# EAGLE board Servo_2side_x4_v2 (EAGLE 9.6.2)
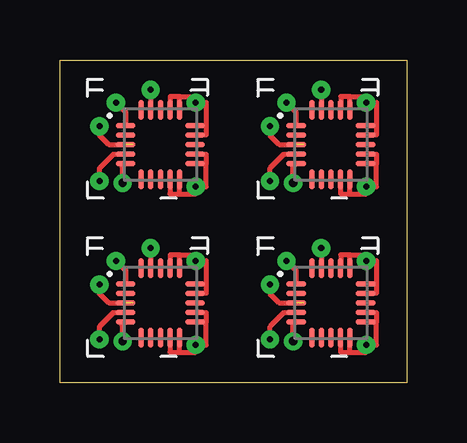
[diagram p0: board, top side]
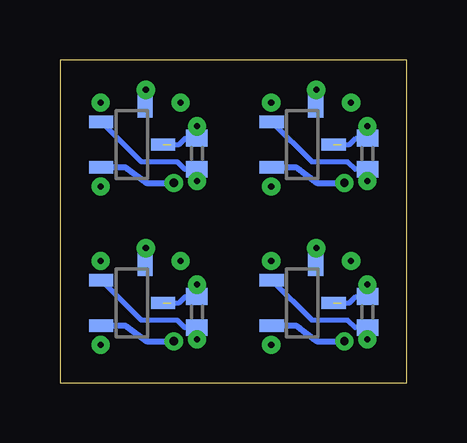
[diagram p1: board, bottom side, seen from below]

Size 14.48 x 13.46 mm. Coordinates in mm from the lower left corner, seen from the top.
Outline: 0,0 0,13.46 14.48,13.46 14.48,0 0,0
Copper layers (1*16): Top 0.035mm / dielectric 1.5mm / Bottom 0.035mm
Design rules "default": minimum track width 6mil, minimum drill 0.35mm, track to track 6mil, track to pad 6mil, pad to pad 6mil, via to via 6mil, smd to smd 6mil, copper to edge 40mil, drill to drill 6mil, minimum pad ring 10mil, minimum via ring 8mil, stop-mask expansion 4mil, vias tented up to drill 0mil, thermal gap 10mil

## Footprints (pad centres in the part's own frame; a part is rotated, then mirrored left to right if it is on the bottom)
C0402 = smd 0.7 x 0.9: 1 -0.65,0; 2 0.65,0
SMALLEST2 = drill 0.254 pad 0.508: P$1 0,0
SMD_SMALL = smd 0.635 x 1.27: P$1 0,0
QFN40P300X300X90-20N = smd 0.811 x 0.22: 1 -1.451,0.8; 2 -1.451,0.4; 3 -1.451,0; 4 -1.451,-0.4; 5 -1.451,-0.8; 11 1.451,-0.8; 12 1.451,-0.4; 13 1.451,0; 14 1.451,0.4; 15 1.451,0.8 | smd 0.22 x 0.811: 6 -0.8,-1.451; 7 -0.4,-1.451; 8 0,-1.451; 9 0.4,-1.451; 10 0.8,-1.451; 16 0.8,1.451; 17 0.4,1.451; 18 0,1.451; 19 -0.4,1.451; 20 -0.8,1.451
SOT23W = smd 0.508 x 1.016: 1 -0.95,-1.278; 2 0.95,-1.278; 3 0,1.303

## Placement (x,y rotation side)
C1  [C0402]  1.65,2.95 90 bottom
C2  [C0402]  8.76,2.95 90 bottom
C3  [C0402]  1.65,9.55 90 bottom
C4  [C0402]  8.76,9.55 90 bottom
GND  [SMALLEST2]  1.65,4.09 0 top
GND1  [SMALLEST2]  8.76,4.09 0 top
GND2  [SMALLEST2]  1.65,10.69 0 top
GND3  [SMALLEST2]  8.76,10.69 0 top
M+  [SMALLEST2]  5.66,1.57 0 top
M+1  [SMALLEST2]  12.78,1.57 0 top
M+2  [SMALLEST2]  5.66,8.18 0 top
M+3  [SMALLEST2]  12.78,8.18 0 top
M-  [SMALLEST2]  5.66,5.08 0 top
M-1  [SMALLEST2]  12.78,5.08 0 top
M-2  [SMALLEST2]  5.66,11.68 0 top
M-3  [SMALLEST2]  12.78,11.68 0 top
P1  [SMD_SMALL]  10.92,5.08 180 bottom
P2  [SMD_SMALL]  3.81,5.08 180 bottom
P3  [SMD_SMALL]  3.81,11.68 180 bottom
P4  [SMD_SMALL]  10.92,11.68 180 bottom
PROG  [SMALLEST2]  3.78,5.61 0 top
PROG1  [SMALLEST2]  10.9,5.61 0 top
PROG2  [SMALLEST2]  3.78,12.22 0 top
PROG3  [SMALLEST2]  10.9,12.22 0 top
SIG  [SMALLEST2]  2.34,5.08 0 top
SIG1  [SMALLEST2]  9.45,5.08 0 top
SIG2  [SMALLEST2]  2.34,11.68 0 top
SIG3  [SMALLEST2]  9.45,11.68 0 top
U1  ATTINY1616-NOPAD  [QFN40P300X300X90-20N]  4.19,3.33 0 top
U2  A1304ELHLX-TSOT23W-NOSILK  [SOT23W]  4.37,3.33 270 bottom
U3  ATTINY1616-NOPAD  [QFN40P300X300X90-20N]  11.3,3.33 0 top
U4  A1304ELHLX-TSOT23W-NOSILK  [SOT23W]  11.48,3.33 270 bottom
U5  ATTINY1616-NOPAD  [QFN40P300X300X90-20N]  4.19,9.93 0 top
U6  A1304ELHLX-TSOT23W-NOSILK  [SOT23W]  4.37,9.93 270 bottom
U7  ATTINY1616-NOPAD  [QFN40P300X300X90-20N]  11.3,9.93 0 top
U8  A1304ELHLX-TSOT23W-NOSILK  [SOT23W]  11.48,9.93 270 bottom
V+  [SMALLEST2]  1.65,1.8 0 top
V+1  [SMALLEST2]  8.76,1.8 0 top
V+2  [SMALLEST2]  1.65,8.41 0 top
V+3  [SMALLEST2]  8.76,8.41 0 top

## Library data of the parts
C1-C4 = rcl; SPICEPREFIX: C
GND GND1-GND3 M+ M+1-M+3 M- M-1-M-3 P1-P4 PROG PROG1-PROG3 SIG SIG1-SIG3 U1-U8 V+ V+1-V+3 = MyParts

## Nets
GND: C1.2 GND.P$1 U1.3 U2.3
GND1: C2.2 GND1.P$1 U3.3 U4.3
GND2: C3.2 GND2.P$1 U5.3 U6.3
GND3: C4.2 GND3.P$1 U7.3 U8.3
M+: M+.P$1 U1.9 U1.10 U1.11 U1.12
M+1: M+1.P$1 U3.9 U3.10 U3.11 U3.12
M+2: M+2.P$1 U5.9 U5.10 U5.11 U5.12
M+3: M+3.P$1 U7.9 U7.10 U7.11 U7.12
M-: M-.P$1 U1.14 U1.15 U1.16 U1.17
M-1: M-1.P$1 U3.14 U3.15 U3.16 U3.17
M-2: M-2.P$1 U5.14 U5.15 U5.16 U5.17
M-3: M-3.P$1 U7.14 U7.15 U7.16 U7.17
N$1: P1.P$1 PROG1.P$1 U3.19
N$2: U3.5 U4.2
N$3: P3.P$1 PROG2.P$1 U5.19
N$4: U5.5 U6.2
N$5: P2.P$1 PROG.P$1 U1.19
N$6: P4.P$1 PROG3.P$1 U7.19
N$7: U7.5 U8.2
N$8: U1.5 U2.2
SIG: SIG.P$1 U1.1
SIG1: SIG1.P$1 U3.1
SIG2: SIG2.P$1 U5.1
SIG3: SIG3.P$1 U7.1
V+: C1.1 U1.4 U2.1 V+.P$1
V+1: C2.1 U3.4 U4.1 V+1.P$1
V+2: C3.1 U5.4 U6.1 V+2.P$1
V+3: C4.1 U7.4 U8.1 V+3.P$1

## Tracks (layer width: path | path; a pad name or v marks a point on that pad's centre or on a via)
GND  (1 unrouted)
  Top 0.203: GND.P$1 1.65,3.71 2.03,3.33 U1.3
  Bottom 0.203: C1.2 GND.P$1 | U2.3 2.4,3.33 2.13,3.6
GND1  (1 unrouted)
  Top 0.203: GND1.P$1 8.76,3.71 9.14,3.33 U3.3
  Bottom 0.203: C2.2 GND1.P$1 | U4.3 9.52,3.33 9.25,3.6
GND2  (1 unrouted)
  Top 0.203: GND2.P$1 1.65,10.31 2.03,9.93 U5.3
  Bottom 0.203: C3.2 GND2.P$1 | U6.3 2.4,9.93 2.13,10.2
GND3  (1 unrouted)
  Top 0.203: GND3.P$1 8.76,10.31 9.14,9.93 U7.3
  Bottom 0.203: C4.2 GND3.P$1 | U8.3 9.52,9.93 9.25,10.2
M+
  Top 0.203: U1.9 4.59,1.27 4.99,1.27 | 4.99,1.27 U1.10 | U1.12 6.1,2.93 6.1,2.53 | 6.1,2.53 U1.11 | 4.99,1.27 5.66,1.27 M+.P$1 6.1,1.57 6.1,2.53
M+1
  Top 0.203: U3.9 11.7,1.27 12.1,1.27 | 12.1,1.27 U3.10 | U3.12 13.21,2.93 13.21,2.53 | 13.21,2.53 U3.11 | 12.1,1.27 12.78,1.27 M+1.P$1 13.21,1.57 13.21,2.53
M+2
  Top 0.203: U5.9 4.59,7.87 4.99,7.87 | 4.99,7.87 U5.10 | U5.12 6.1,9.53 6.1,9.13 | 6.1,9.13 U5.11 | 4.99,7.87 5.66,7.87 M+2.P$1 6.1,8.18 6.1,9.13
M+3
  Top 0.203: U7.9 11.7,7.87 12.1,7.87 | 12.1,7.87 U7.10 | U7.12 13.21,9.53 13.21,9.13 | 13.21,9.13 U7.11 | 12.1,7.87 12.78,7.87 M+3.P$1 13.21,8.18 13.21,9.13
M-
  Top 0.203: U1.16 4.99,5.33 | 4.99,5.33 4.6,5.33 U1.17 | U1.15 6.1,4.13 | U1.14 6.1,3.73 6.1,4.13 | 4.99,5.33 5.66,5.33 M-.P$1 6.1,5.08 6.1,4.13
M-1
  Top 0.203: U3.16 12.1,5.33 | 12.1,5.33 11.71,5.33 U3.17 | U3.15 13.21,4.13 | U3.14 13.21,3.73 13.21,4.13 | 12.1,5.33 12.78,5.33 M-1.P$1 13.21,5.08 13.21,4.13
M-2
  Top 0.203: U5.16 4.99,11.94 | 4.99,11.94 4.6,11.94 U5.17 | U5.15 6.1,10.73 | U5.14 6.1,10.33 6.1,10.73 | 4.99,11.94 5.66,11.94 M-2.P$1 6.1,11.68 6.1,10.73
M-3
  Top 0.203: U7.16 12.1,11.94 | 12.1,11.94 11.71,11.94 U7.17 | U7.15 13.21,10.73 | U7.14 13.21,10.33 13.21,10.73 | 12.1,11.94 12.78,11.94 M-3.P$1 13.21,11.68 13.21,10.73
N$1
  Top 0.152: U3.19 | PROG1.P$1
  Top 0.203: PROG1.P$1 U3.19
  Bottom 0.152: PROG1.P$1 10.92,5.59 P1.P$1
N$2  (via drill 0.35)
  Top 0.203: U3.5 9.73,2.4
  Top 0.254: 9.73,2.4 v9.73,1.73
  Bottom 0.254: v9.73,1.73 10.87,1.73 11.76,2.39 12.75,2.38 U4.2
N$3
  Top 0.152: U5.19 | PROG2.P$1 3.79,12.21
  Top 0.203: 3.79,12.21 U5.19
  Bottom 0.152: PROG2.P$1 3.81,12.19 P3.P$1
N$4  (via drill 0.35)
  Top 0.203: U5.5 2.61,9
  Top 0.254: 2.61,9 v2.61,8.33
  Bottom 0.254: v2.61,8.33 3.76,8.33 4.64,8.99 5.63,8.98 U6.2
N$5
  Top 0.152: U1.19 | PROG.P$1 3.79,5.61
  Top 0.203: 3.79,5.61 U1.19
  Bottom 0.152: PROG.P$1 3.81,5.59 P2.P$1
N$6
  Top 0.152: U7.19 | PROG3.P$1
  Top 0.203: PROG3.P$1 U7.19
  Bottom 0.152: PROG3.P$1 10.92,12.19 P4.P$1
N$7  (via drill 0.35)
  Top 0.203: U7.5 9.73,9
  Top 0.254: 9.73,9 v9.73,8.33
  Bottom 0.254: v9.73,8.33 10.87,8.33 11.76,8.99 12.75,8.98 U8.2
N$8  (via drill 0.35)
  Top 0.203: U1.5 2.61,2.4
  Top 0.254: 2.61,2.4 v2.61,1.73
  Bottom 0.254: v2.61,1.73 3.76,1.73 4.64,2.39 5.63,2.38 U2.2
SIG
  Top 0.203: SIG.P$1 2.74,4.68 U1.1
SIG1
  Top 0.203: SIG1.P$1 9.85,4.68 U3.1
SIG2
  Top 0.203: SIG2.P$1 2.74,11.28 U5.1
SIG3
  Top 0.203: SIG3.P$1 9.85,11.28 U7.1
V+
  Top 0.203: V+.P$1 1.65,2.35 2.23,2.93 U1.4
  Bottom 0.203: U2.1 3.97,2.62 2.48,2.62 2.16,2.3 C1.1 V+.P$1
V+1
  Top 0.203: V+1.P$1 8.76,2.35 9.35,2.93 U3.4
  Bottom 0.203: U4.1 11.09,2.62 9.59,2.62 9.27,2.3 C2.1 V+1.P$1
V+2
  Top 0.203: V+2.P$1 1.65,8.95 2.23,9.53 U5.4
  Bottom 0.203: U6.1 3.97,9.22 2.48,9.22 2.16,8.9 C3.1 V+2.P$1
V+3
  Top 0.203: V+3.P$1 8.76,8.95 9.35,9.53 U7.4
  Bottom 0.203: U8.1 11.09,9.22 9.59,9.22 9.27,8.9 C4.1 V+3.P$1